# Altium PCB P1234.02_PCB.PcbDoc
Units mm, origin at the board's own origin, x right, y up, seen from the top; angles counter-clockwise.
Board outline 100 x 100 mm, 4 copper layers (Top Layer, MidLayer 1, MidLayer 2, Bottom Layer), stack 1.68 mm thick; 11 components, 0 nets, 9 pads, 0 vias.
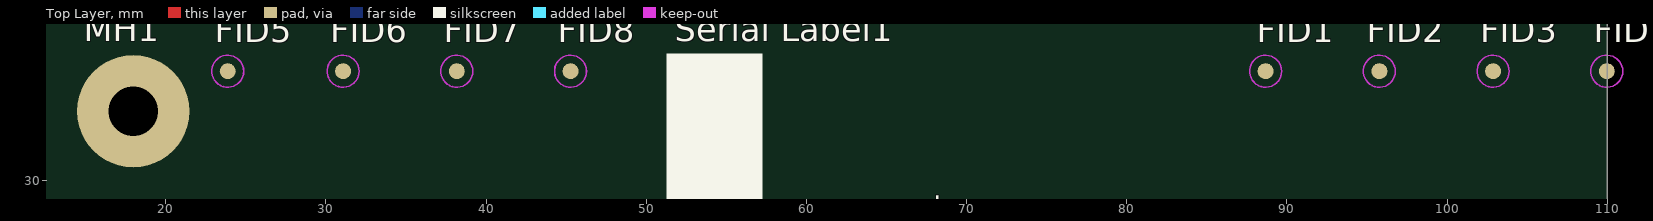
[diagram p0: Top Layer view]
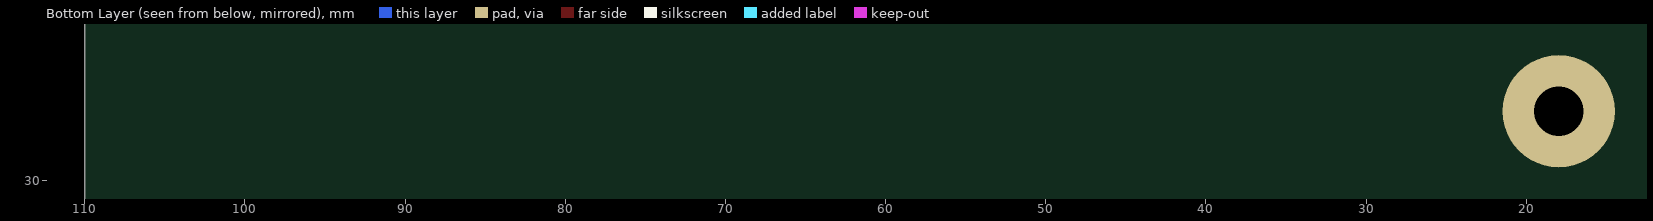
[diagram p1: Bottom Layer view, seen from below]

## Layer stack, top to bottom
Top Solder: solder mask 0.0102, Solder Resist, Dk 3.5
Top Layer: signal copper 0.035
Dielectric 1: prepreg 0.1803, PP-021, Dk 4.7
Dielectric 2: prepreg 0.1168, PP-016, Dk 4.4
Dielectric 3: prepreg 0.1168, PP-016, Dk 4.4
MidLayer 1: signal copper 0.035
Dielectric 4: core 0.7112, Core-039, Dk 4.8
MidLayer 2: signal copper 0.036
Dielectric 5: prepreg 0.1168, PP-016, Dk 4.4
Dielectric 7: prepreg 0.1168, PP-016, Dk 4.4
Dielectric 6: prepreg 0.1803, PP-021, Dk 4.7
Bottom Layer: signal copper 0.035
Bottom Solder: solder mask 0.0102, Solder Resist, Dk 3.5

## Board outline
10,10 110,10 110,110 10,110

## Design rules (kind name [scope] priority, off if disabled: settings)
BoardOutlineClearance [All] p1: gap=0.5 ignorepadtopadclearanceinfootprint=FALSE
Clearance "Net Class Example" [InNetClass('Net Class 1') and not InNet('GND') vs Not InNetClass('Net Class 1') AND InAnyNet] p1: gap=0.75 ignorepadtopadclearanceinfootprint=FALSE
Clearance [All] p2: gap=0.2 ignorepadtopadclearanceinfootprint=FALSE
ComponentClearance "Board Outline Component Clearance" [IsBoardOutline] p1: gap=1 collisioncheckmode=3 verticalgap=0.254 showdistances=FALSE
ComponentClearance "Component to Component Clearance" [All] p2: gap=0.254 collisioncheckmode=3 verticalgap=0.254 showdistances=FALSE
DiffPairsRouting [All] p1: maxlimit=0.254 minlimit=0.254 mostfreqgap=0.254 toplayer_minwidth=0.381 toplayer_maxwidth=0.381 toplayer_prefwidth=0.381 midlayer1_minwidth=0.381 midlayer1_maxwidth=0.381 midlayer1_prefwidth=0.381 midlayer2_minwidth=0.381 midlayer2_maxwidth=0.381 midlayer2_prefwidth=0.381 bottomlayer_minwidth=0.381 bottomlayer_maxwidth=0.381 bottomlayer_prefwidth=0.381 substack1={EC1DFED8-8393-4C60-AB83-DAEC3FB1107D} toplayer_{ec1dfed8-8393-4c60-ab83-daec3fb1107d}_minwidth=0.381 toplayer_{ec1dfed8-8393-4c60-ab83-daec3fb1107d}_maxwidth=0.381 toplayer_{ec1dfed8-8393-4c60-ab83-daec3fb1107d}_prefwidth=0.381 midlayer1_{ec1dfed8-8393-4c60-ab83-daec3fb1107d}_minwidth=0.381 midlayer1_{ec1dfed8-8393-4c60-ab83-daec3fb1107d}_maxwidth=0.381 midlayer1_{ec1dfed8-8393-4c60-ab83-daec3fb1107d}_prefwidth=0.381 midlayer2_{ec1dfed8-8393-4c60-ab83-daec3fb1107d}_minwidth=0.381 midlayer2_{ec1dfed8-8393-4c60-ab83-daec3fb1107d}_maxwidth=0.381 midlayer2_{ec1dfed8-8393-4c60-ab83-daec3fb1107d}_prefwidth=0.381 bottomlayer_{ec1dfed8-8393-4c60-ab83-daec3fb1107d}_minwidth=0.381 bottomlayer_{ec1dfed8-8393-4c60-ab83-daec3fb1107d}_maxwidth=0.381 bottomlayer_{ec1dfed8-8393-4c60-ab83-daec3fb1107d}_prefwidth=0.381 maxuncoupledlength=12.7
HoleSize [All] p1: absolutevalues=TRUE maxlimit=6 minlimit=0.2 maxpercent=80.000 minpercent=20.000
MinimumAnnularRing "Via annular ring" [IsVia] p1: minimumring=0.124
MinimumAnnularRing "Pad Annular Ring" [All] p2: minimumring=0.2
PlaneConnect [All] p1: planeconnectstyle=Relief reliefexpansion=0.508 reliefentries=4 reliefconductorwidth=0.5 reliefairgap=0.5
PolygonConnect [All] p1: thpad.connectstyle=Relief thpad.reliefconductorwidth=0.5 thpad.reliefentries=4 thpad.polygonreliefangle="90 Angle" thpad.airgapwidth=0.5 smdpad.connectstyle=Relief smdpad.reliefconductorwidth=0.254 smdpad.reliefentries=4 smdpad.polygonreliefangle="90 Angle" smdpad.airgapwidth=0.254 via.connectstyle=Direct via.reliefconductorwidth=0.254 via.reliefentries=4 via.polygonreliefangle="90 Angle" via.airgapwidth=0.254
RoutingVias [All] p1: holewidth=0.3 width=0.7 viastyle="Through Hole" minholewidth=0.2 minwidth=0.45 maxholewidth=1.4 maxwidth=2
SolderMaskExpansion [All] p1: expansion=0.102 istentingtop=FALSE
UnRoutedNet [All] p1: checkbadconnections=TRUE
Width [All] p1: maxlimit=4 minlimit=0.15 preferedwidth=0.25 substack1={EC1DFED8-8393-4C60-AB83-DAEC3FB1107D}
25 further rules are at their usual default settings.

## Classes and differential pairs
component class "P1234.01_PCB Features": FID5 FID6 FID7 "MAC label1" MH1 PCB? SC? "Serial Label1"

## Components (designator, comment, footprint, x,y, rotation, side; value= is the part's Value field where it differs from the comment)
FID1 "FID" FID 88.666,36.847 r90 top
FID2 "FID" FID 95.766,36.847 r90 top
FID3 "FID" FID 102.866,36.847 r90 top
FID4 "FID" FID 109.966,36.847 r90 top
FID5 "FID" FID 23.866,36.847 r90 top
FID6 "FID" FID 31.066,36.847 r90 top
FID7 "FID" FID 38.166,36.847 r90 top
FID8 "FID" FID 45.266,36.847 r90 top
"MAC label1" "MAC label" "MAC label 32 x 6" 85,20 r180 top
MH1 "Mounting Hole" "Mounting Hole M3" 17.966,34.347 r0 top
"Serial Label1" "Serial Label 19 x6" "Serial Label 19 x 6" 54.266,28.447 r90 top

## Footprints (in the part's own frame and the unit in brackets; to place one, negate y for a bottom-side part, rotate by r counter-clockwise, add the part's x,y. Pads: shape width x height; smd on the part's side, far side on the other; paste and mask are expansions set on the pad)
FID [mm]
  round 1 smd paste-1 mask+0.5: 0(0,0)
  Top Layer keep-out circle w0.1: c0,0 r1
"MAC label 32 x 6" [mm] "PCB MAC address label reflowable"
  silkscreen extent -16,-3 16,3
"Mounting Hole M3" [mm]
  round 7 hole 3.1: 1(0,0)
"Serial Label 19 x 6" [mm] "Standard serial label reflowable"
  silkscreen extent -9.5,-3 9.5,3

## Part data
FID1 FID2 FID3 FID4 FID5 FID6 FID7 FID8: Part Number=N/A, 3D Lib Path="K:\Altium\Trolex Library June 2015\Trolex 3D Components June 2015", Category=Connectors, Created By=BTS, Created Date=04/06/2015, Footprint Path="K:\Altium\Trolex Library June 2015\Trolex Footprint Library June 2015\Trolex Footprints June 2015.PcbLib", Symbol ID=FID, Symbol Path="K:\Altium\Trolex Library June 2015\Trolex Schematic Library Imperial\Mechanical.SchLib"
"MAC label1": "MAC address label 32 x 6"
MH1: Part Number=S*, 3D Lib Path="K:\Altium\Trolex Library June 2015\Trolex 3D Components June 2015", Category=Connectors, Created By=BTS, Created Date=04/06/2015, Footprint Path="K:\Altium\Trolex Library June 2015\Trolex Footprint Library June 2015\Trolex Footprints June 2015.PcbLib", Symbol ID="XSUP015AY PRESSURE SENSOR", Symbol Path="K:\Altium\Trolex Library June 2015\Trolex Schematic Library Imperial\Mechanical.SchLib"
"Serial Label1": library part "Serial Label"

## Nets (pads, with @x,y where several pads share a name; then routed paths per layer and width w, separated by ;. In a path a pad name is that pad's centre, name@x,y a point inside that pad or via, vN(x,y) a via of type N, cw(c..) or ccw(c..) an arc to the next point about the centre after c; other vN are vias at no path point)
pads on no net: FID1.0 FID2.0 FID3.0 FID4.0 FID5.0 FID6.0 FID7.0 FID8.0 MH1.1

## Silkscreen, mask and mechanical layers (free items; w line width, h text height)
PCB Outline:
  the board outline again, w0.2